# Altium PCB splitterBoard.PcbDoc
Units mm, origin at the board's own origin, x right, y up, seen from the top; angles counter-clockwise.
Board outline 25 x 25 mm, 2 copper layers (Top Layer, Bottom Layer); 9 components, 4 nets, 38 pads, 0 vias.
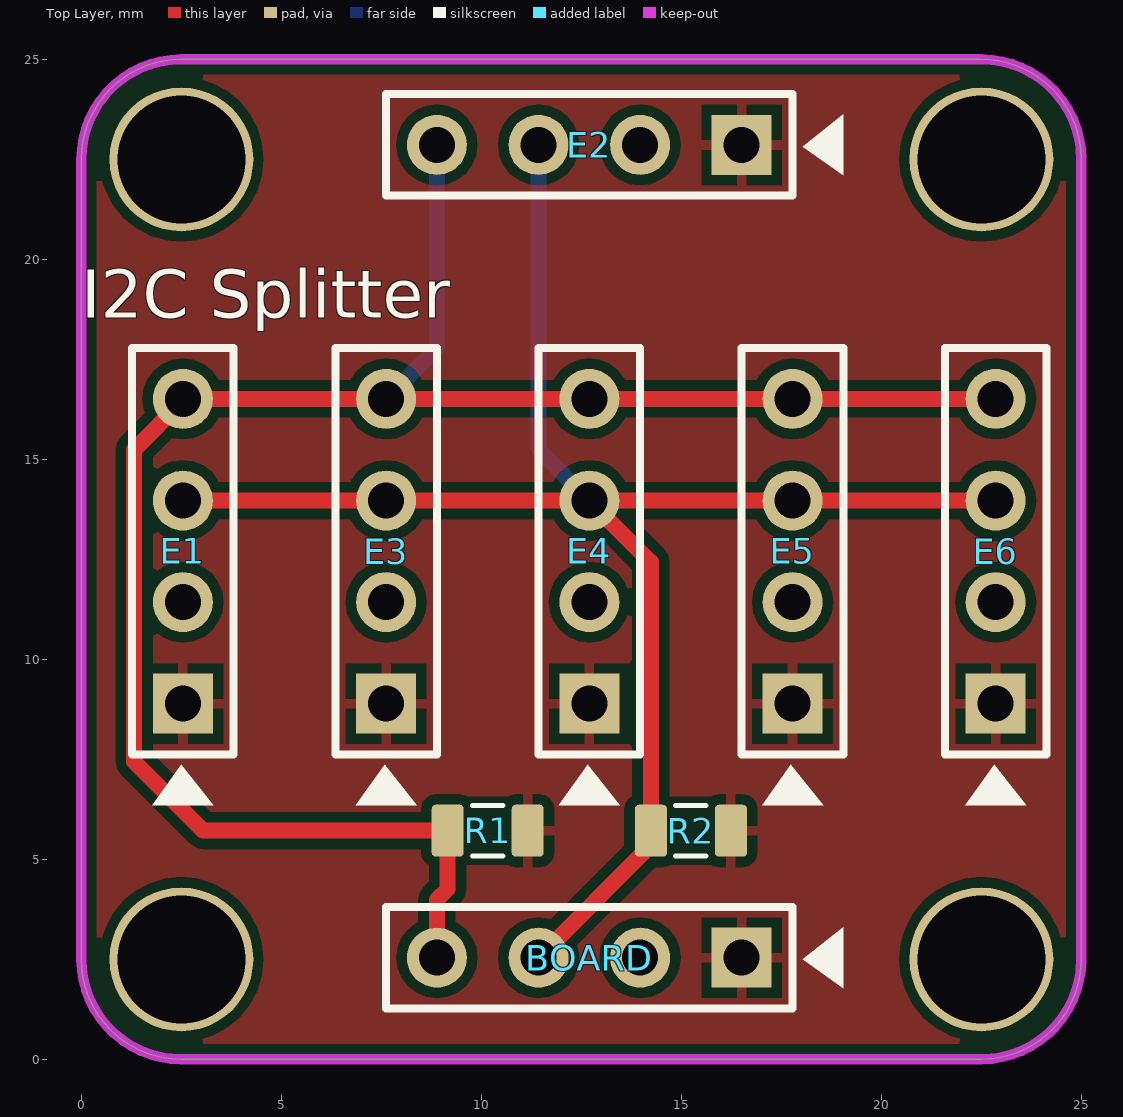
[diagram p0: Top Layer view]
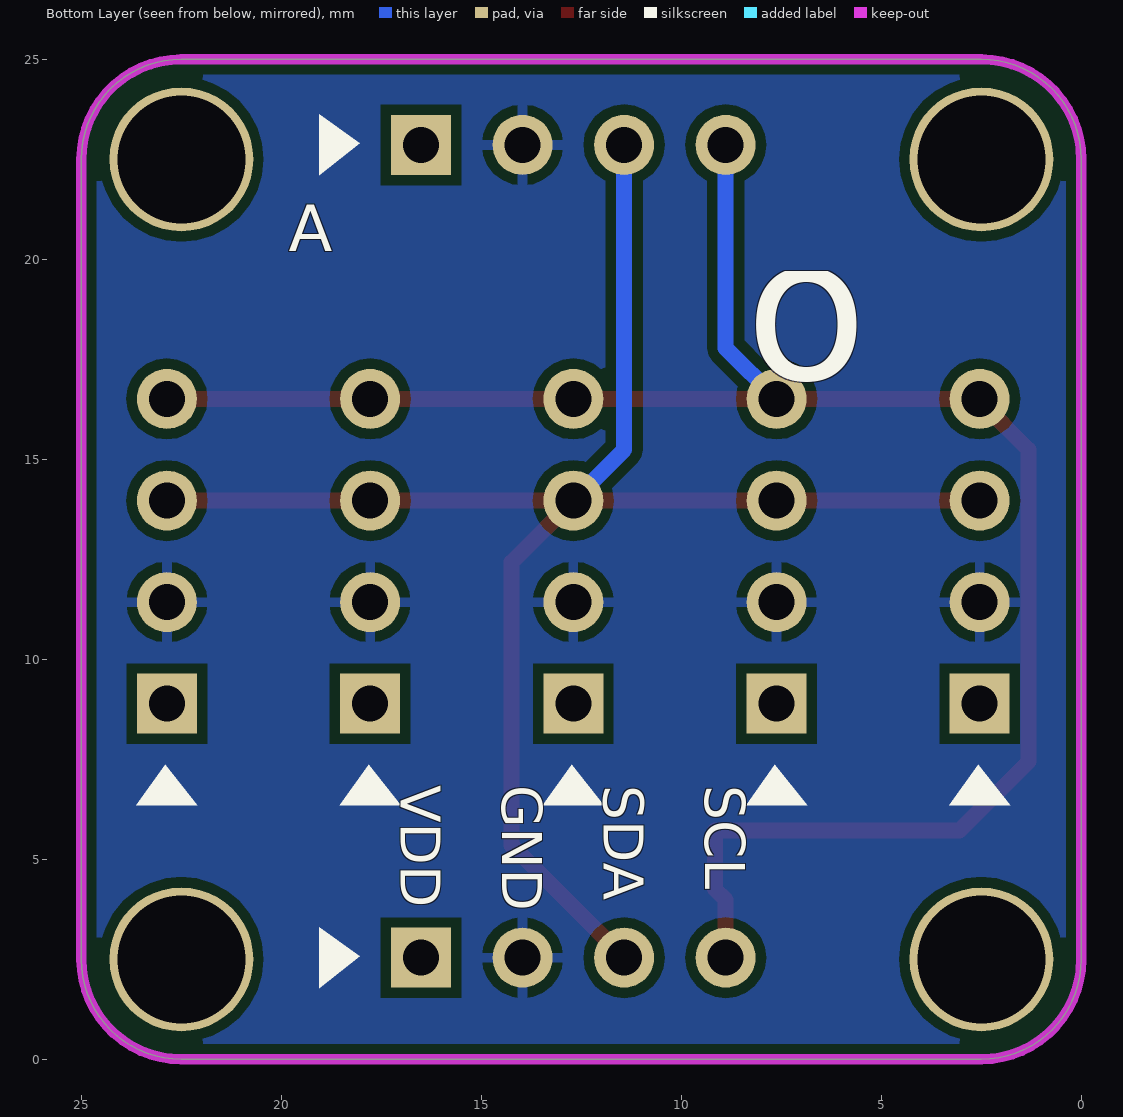
[diagram p1: Bottom Layer view, seen from below]

## Layer stack, top to bottom
Top Solder: solder mask 0.0102, Solder Resist, Dk 3.5
Top Layer: signal copper 0.0356
Dielectric1: dielectric 0.32, FR-4, Dk 4.8
Bottom Layer: signal copper 0.0356
Bottom Solder: solder mask 0.0102, Solder Resist, Dk 3.5

## Board outline
0,2.5 0,22.5 cw(c2.5,22.5) 2.5,25 22.5,25 cw(c22.5,22.5) 25,22.5 25,2.5 cw(c22.5,2.5) 22.5,0 2.5,0 cw(c2.5,2.5)

## Design rules (kind name [scope] priority, off if disabled: settings)
Clearance [All] p1: gap=0.254
FabricationTestPointUsage TestPointUsage [All] p1: valid=0 allowmultiple=FALSE
FabricationTestpoint Testpoint [All] p1: side=3 testpointundercomponent=TRUE minsize=1.016 maxsize=2.54 preferedsize=1.524 minholesize=0 maxholesize=1.016 preferedholesize=0.813 testpointgrid=0.025 allowsidetop=TRUE allowsidebottom=TRUE usegrid=TRUE gridtolerance=0
PolygonConnect [All] p1: connectstyle=Relief reliefconductorwidth=0.254 reliefentries=4 polygonreliefangle="90 Angle" airgapwidth=0.254
RoutingVias [All] p1: holewidth=0.711 width=1.27 viastyle="Through Hole" minholewidth=0.711 minwidth=1.27 maxholewidth=0.711 maxwidth=1.27
SilkToSolderMaskClearance SilkscreenOverComponentPads [IsPad] p1: minsilkscreentomaskgap=0.254 clearancetoexposedcopper=TRUE
SolderMaskExpansion [All] p1: expansion=0.102
Width [All] p1: maxlimit=0.4 minlimit=0.4 preferedwidth=0.4
27 further rules are at their usual default settings.

## Components (designator, comment, footprint, x,y, rotation, side; value= is the part's Value field where it differs from the comment)
BOARD "Header 4" HDR1X4 16.51,2.54 r180 top
E1 "Header 4" HDR1X4 2.54,8.89 r90 top
E2 "Header 4" HDR1X4 16.51,22.86 r180 top
E3 "Header 4" HDR1X4 7.62,8.89 r90 top
E4 "Header 4" HDR1X4 12.7,8.89 r90 top
E5 "Header 4" HDR1X4 17.78,8.89 r90 top
E6 "Header 4" HDR1X4 22.86,8.89 r90 top
R1 "RES_EMPTY_0805" RESC2012X70N 10.16,5.715 r180 top
R2 "RES_EMPTY_0805" RESC2012X70N 15.24,5.715 r180 top

## Footprints (in the part's own frame and the unit in brackets; to place one, negate y for a bottom-side part, rotate by r counter-clockwise, add the part's x,y. Pads: shape width x height; smd on the part's side, far side on the other; paste and mask are expansions set on the pad)
HDR1X4 [mm] "Connector; Header; 4 Position"
  rect 1.5x1.5 hole 0.9: 1(0,0)
  round 1.5 hole 0.9: 2(2.54,0) 3(5.08,0) 4(7.62,0)
  silkscreen extent -1.27,-1.27 8.89,1.27
RESC2012X70N [mm] "Chip Resistor, Body 2.0x1.2mm, EIA 0805, IPC Medium Density"
  round 0.254 on Mech15: 0(0,0)
  rrect25% 0.8x1.3 smd: 1(-1,0) 2(1,0)
  Top Layer pour cut-out: -0.725,0.65 -0.525,0.85 0.525,0.85 0.725,0.65 0.725,-0.65 0.525,-0.85 -0.525,-0.85 -0.725,-0.65
  silkscreen extent -0.38,-0.64 0.38,0.64, body extent -1.1,-0.67 1.1,0.68, height 0.69

## Part data
BOARD E1 E2 E3 E4 E5 E6: "Header, 4-Pin"
R1 R2: "Resistor, 0805 SMD, Empty footprint"

## Free pads (board coordinates)
  round 3.6 hole 3.2: 0(2.5,2.5) 0(2.5,22.5) 0(22.5,2.5) 0(22.5,22.5)

## Nets (pads, with @x,y where several pads share a name; then routed paths per layer and width w, separated by ;. In a path a pad name is that pad's centre, name@x,y a point inside that pad or via, vN(x,y) a via of type N, cw(c..) or ccw(c..) an arc to the next point about the centre after c; other vN are vias at no path point)
NetBOARD_1: BOARD.1 E1.1 E2.1 E3.1 E4.1 E5.1 E6.1 R1.1 R2.1
NetBOARD_2: BOARD.2 E1.2 E2.2 E3.2 E4.2 E5.2 E6.2
NetBOARD_3: BOARD.3 E1.3 E2.3 E3.3 E4.3 E5.3 E6.3 R2.2 | length 43
  Top Layer w0.4: E1.3 E3.3 E4.3 ; BOARD.3 14.24,5.35 R2.2 14.24,12.43 E4.3 ; E6.3 E5.3 E4.3
  Bottom Layer w0.4: E2.3 11.43,15.24 E4.3
NetBOARD_4: BOARD.4 E1.4 E2.4 E3.4 E4.4 E5.4 E6.4 R1.2 | length 48.6
  Top Layer w0.4: BOARD.4 8.89,3.988 9.16,4.258 R1.2 3.048,5.715 1.321,7.442 1.321,15.24 2.54,16.459 E1.4 E3.4 E4.4 E5.4 E6.4
  Bottom Layer w0.4: E3.4 8.89,17.78 E2.4
pads on no net: R1.0 R2.0

## Polygon pours and split planes (outlines as drawn)
NetBOARD_1 on Top Layer "Bottom Layer-GND" (solid, pour order 0): 0,0 0,25.4 25,25.4 25,0
NetBOARD_2 on Bottom Layer "Bottom Layer-GND" (solid, pour order 2): 0,0 0,25.4 25,25.4 25,0

## Keep-outs
Keep-Out Layer:
  the board outline again, w0.254

## Silkscreen, mask and mechanical layers (free items; w line width, h text height)
Top Overlay:
  region: 18.034,22.82 19.05,23.622 19.05,22.098
  region: 2.5,7.366 3.302,6.35 1.778,6.35
  region: 7.58,7.366 8.382,6.35 6.858,6.35
  region: 12.66,7.366 13.462,6.35 11.938,6.35
  region: 17.74,7.366 18.542,6.35 17.018,6.35
  region: 22.82,7.366 23.622,6.35 22.098,6.35
  region: 18.034,2.5 19.05,3.302 19.05,1.778
  text "I2C Splitter" at 0,18.542 h1.2
Bottom Overlay:
  region: 18.034,2.58 19.05,1.778 19.05,3.302
  region: 22.9,7.366 22.098,6.35 23.622,6.35
  region: 17.82,7.366 17.018,6.35 18.542,6.35
  region: 12.74,7.366 11.938,6.35 13.462,6.35
  region: 7.66,7.366 6.858,6.35 8.382,6.35
  region: 2.58,7.366 1.778,6.35 3.302,6.35
  region: 18.034,22.9 19.05,22.098 19.05,23.622
  text "A" at 19.812,19.812 h2
  text "o" at 5.334,15.494 h8
  text "SCL" at 9.398,6.858 h1 r90
  text "SDA" at 11.938,6.858 h1 r90
  text "GND" at 14.478,6.858 h1 r90
  text "VDD" at 17.018,6.858 h1 r90
Mechanical 4:
  circle w0.254: c2.5,22.5 r3
  circle w0.254: c2.5,2.5 r3
  circle w0.254: c22.5,2.5 r3
  circle w0.254: c22.5,22.5 r3
  circle w0.254: c22.5,22.5 r1.6
  circle w0.254: c2.5,22.5 r3
  circle w0.254: c2.5,2.5 r3
  circle w0.254: c22.5,2.5 r3
  circle w0.254: c22.5,22.5 r3
  text "Hole Diameter" at 29,21 h1
  text "Bolt Clearance" at 28,1 h1
  text "All units are in millimetres" at 0,-3 h1
Mechanical 16:
  drawing of 1874 lines, arcs and shapes, not listed
  text "1" at -86.436,97.155 h1.78
  text "2" at -13.792,97.155 h1.78
  text "3" at 59.36,97.155 h1.78
  text "4" at 132.258,97.155 h1.78
  text "A" at -120.777,74.143 h1.78
  text "A" at 166.243,74.143 h1.78
  text "B" at -120.777,26.086 h1.78
  text "B" at 166.243,26.086 h1.78
  text "C" at -120.777,-22.428 h1.78
  text "C" at 166.243,-22.428 h1.78
  text "ENGINEER:" at 51.308,-59.436 h1.14
  text "TITLE:" at 89.408,-59.436 h1.14
  text "PCB DESIGNER:" at 51.308,-66.929 h1.14
  text "D" at -120.777,-70.434 h1.78
  text "D" at 166.243,-70.434 h1.78
  text "DATE:" at 51.308,-74.676 h1.14
  text "PART NO.:" at 89.408,-74.676 h1.14
  text "REV:" at 142.748,-74.676 h1.14
  text "Altium Limited" at 18.288,-77.216 h1.78
  text ".PRINT_DATE" at 52.578,-77.724 h1.78
  text "12a Rodborough Rd" at 18.288,-79.756 h1.78
  text "Frenchs Forest" at 18.288,-82.296 h1.78
  text "FILE NAME:" at 51.308,-82.296 h1.14
  text "DWG NO:" at 89.408,-82.296 h1.14
  text "SCALE:" at 142.748,-82.296 h1.14
  text "NSW 2086" at 18.288,-84.836 h1.78
  text ".PCB_FILE_NAME_NO_PATH" at 52.578,-85.344 h1.78
  text "1" at -86.436,-90.805 h1.78
  text "2" at -13.792,-90.805 h1.78
  text "3" at 59.36,-90.805 h1.78
  text "4" at 132.258,-90.805 h1.78

## Dimensions
22.5,22.5 to 39.349,26.286 on Mechanical 4
22.5,2.5 to 39.349,6.286 on Mechanical 4
2.5,22.5 to 22.5,22.5 on Mechanical 16
0,22.5 to 25,22.5 on Mechanical 16
2.5,25 to 2.5,0 on Mechanical 16
2.5,22.5 to 2.5,2.5 on Mechanical 16